# Altium PCB PCB2.PcbDoc
Units mil, origin at the board's own origin, x right, y up, seen from the top; angles counter-clockwise.
Board outline 2755.91 x 2755.91 mil, 4 copper layers (Top Layer, GND02, VCC03, Bottom Layer), stack 22.378 mil thick; 78 components, 66 nets, 270 pads, 287 vias.
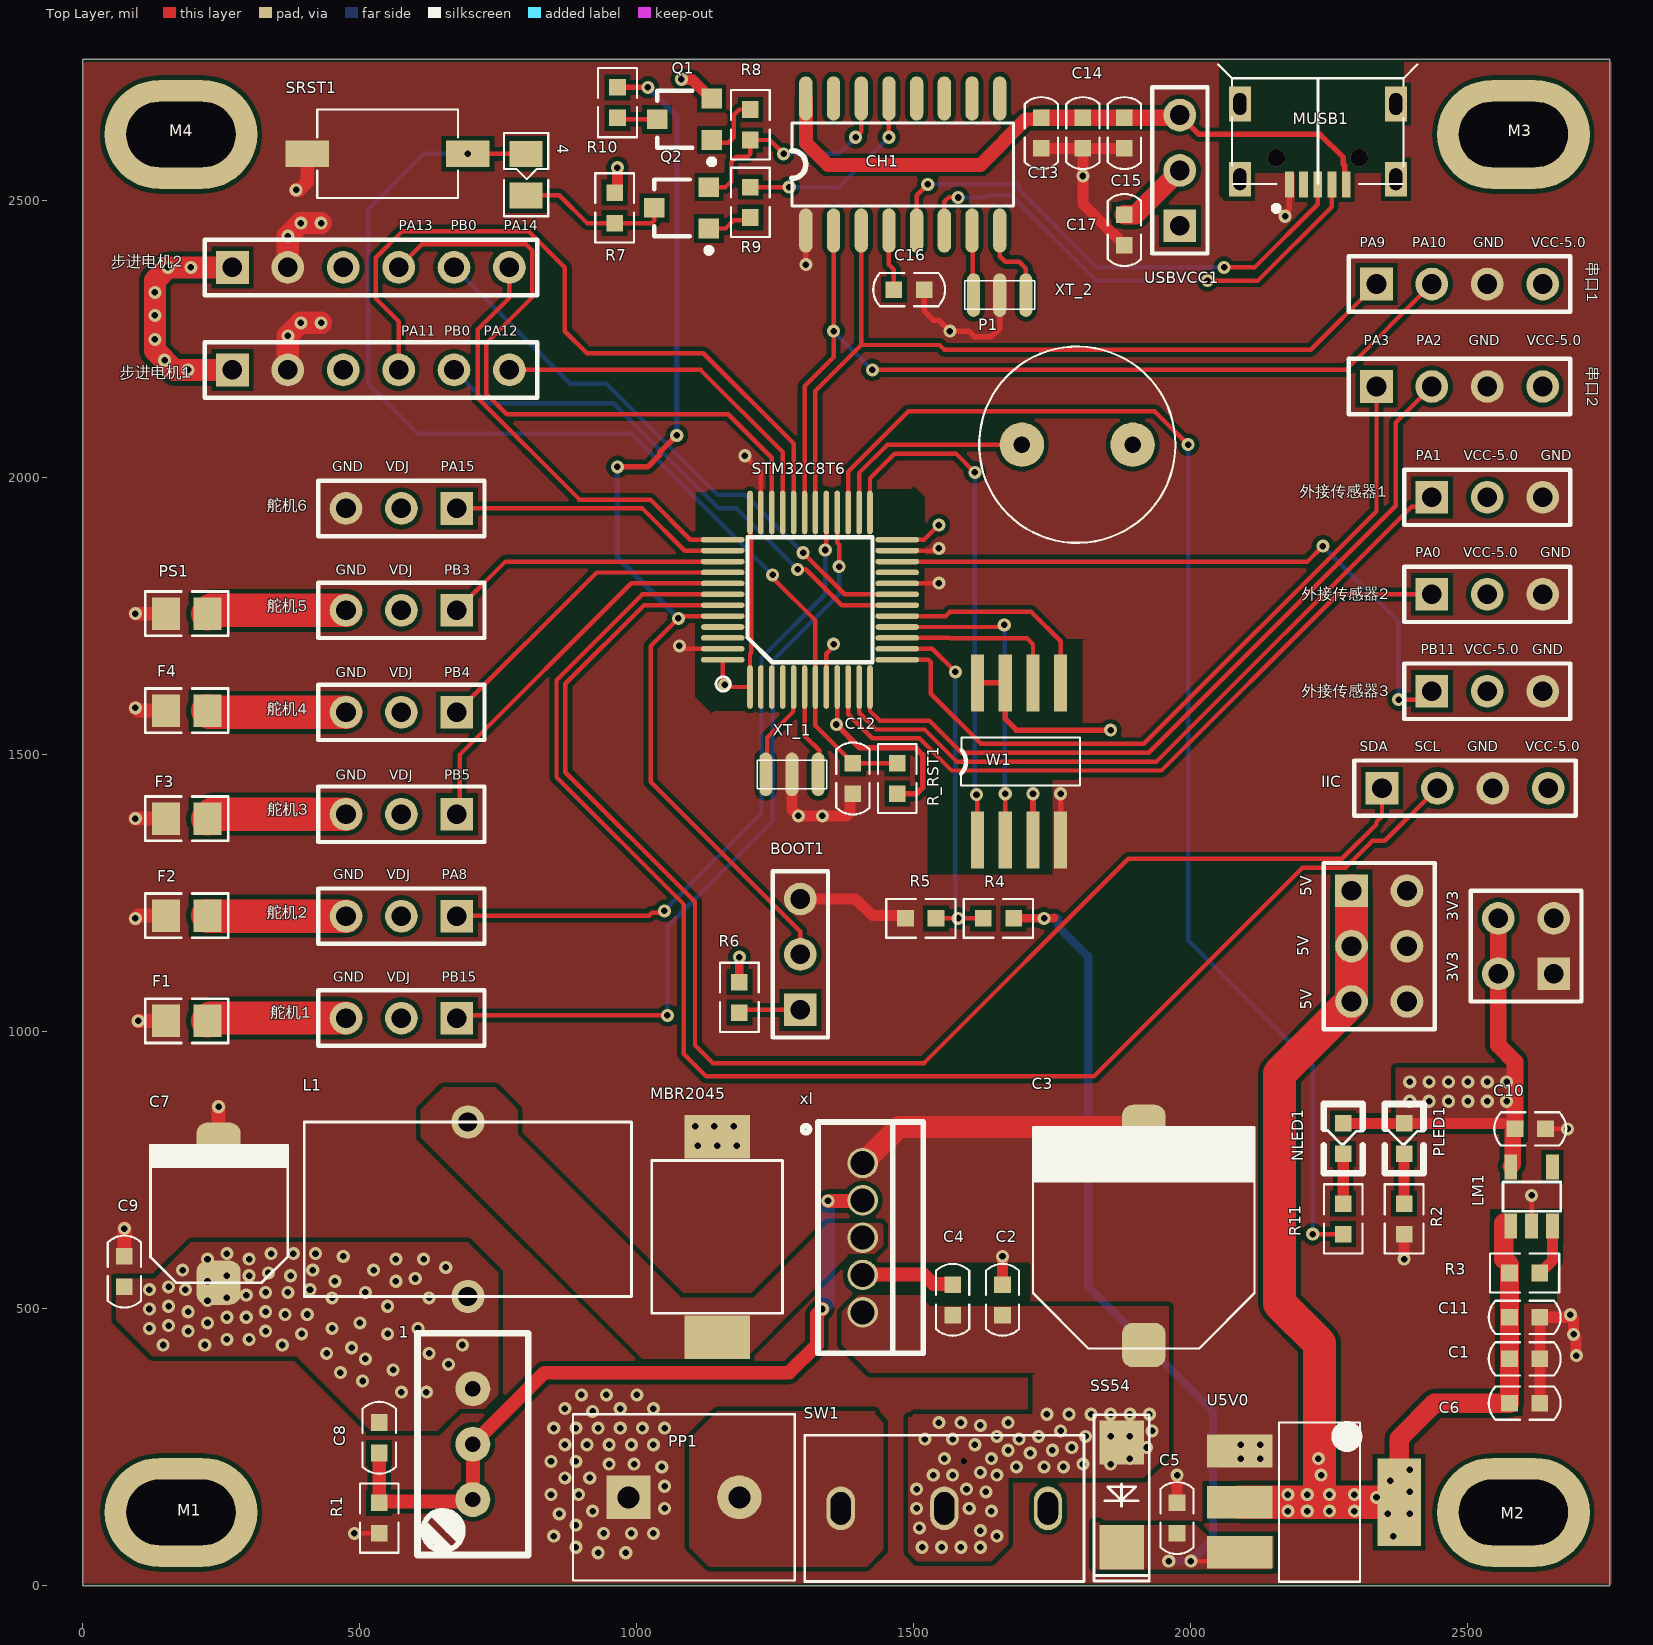
[diagram p0: Top Layer view]
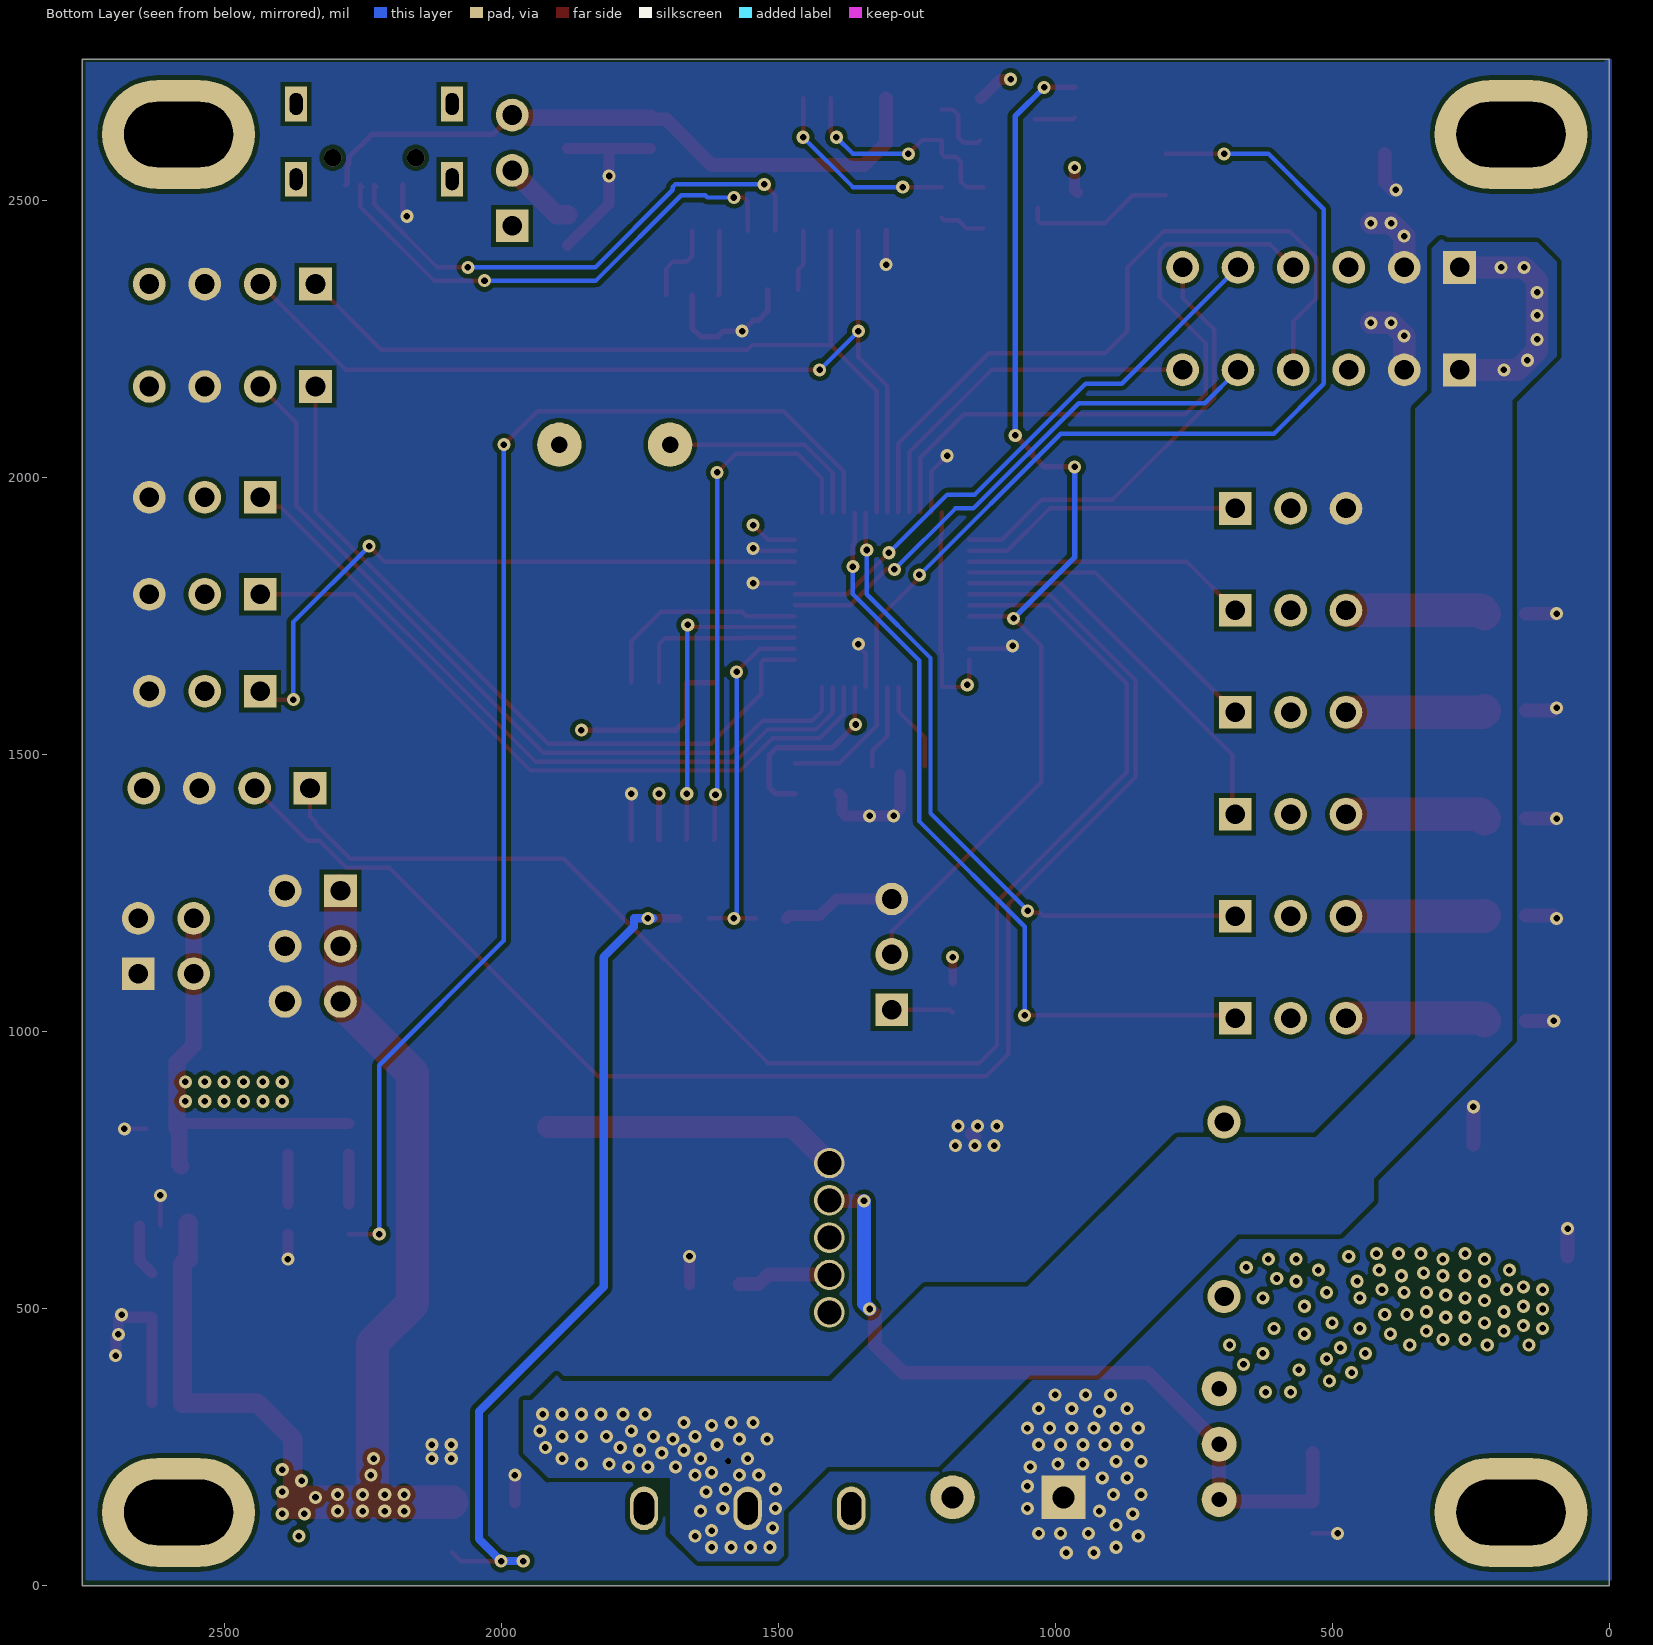
[diagram p1: Bottom Layer view, seen from below]
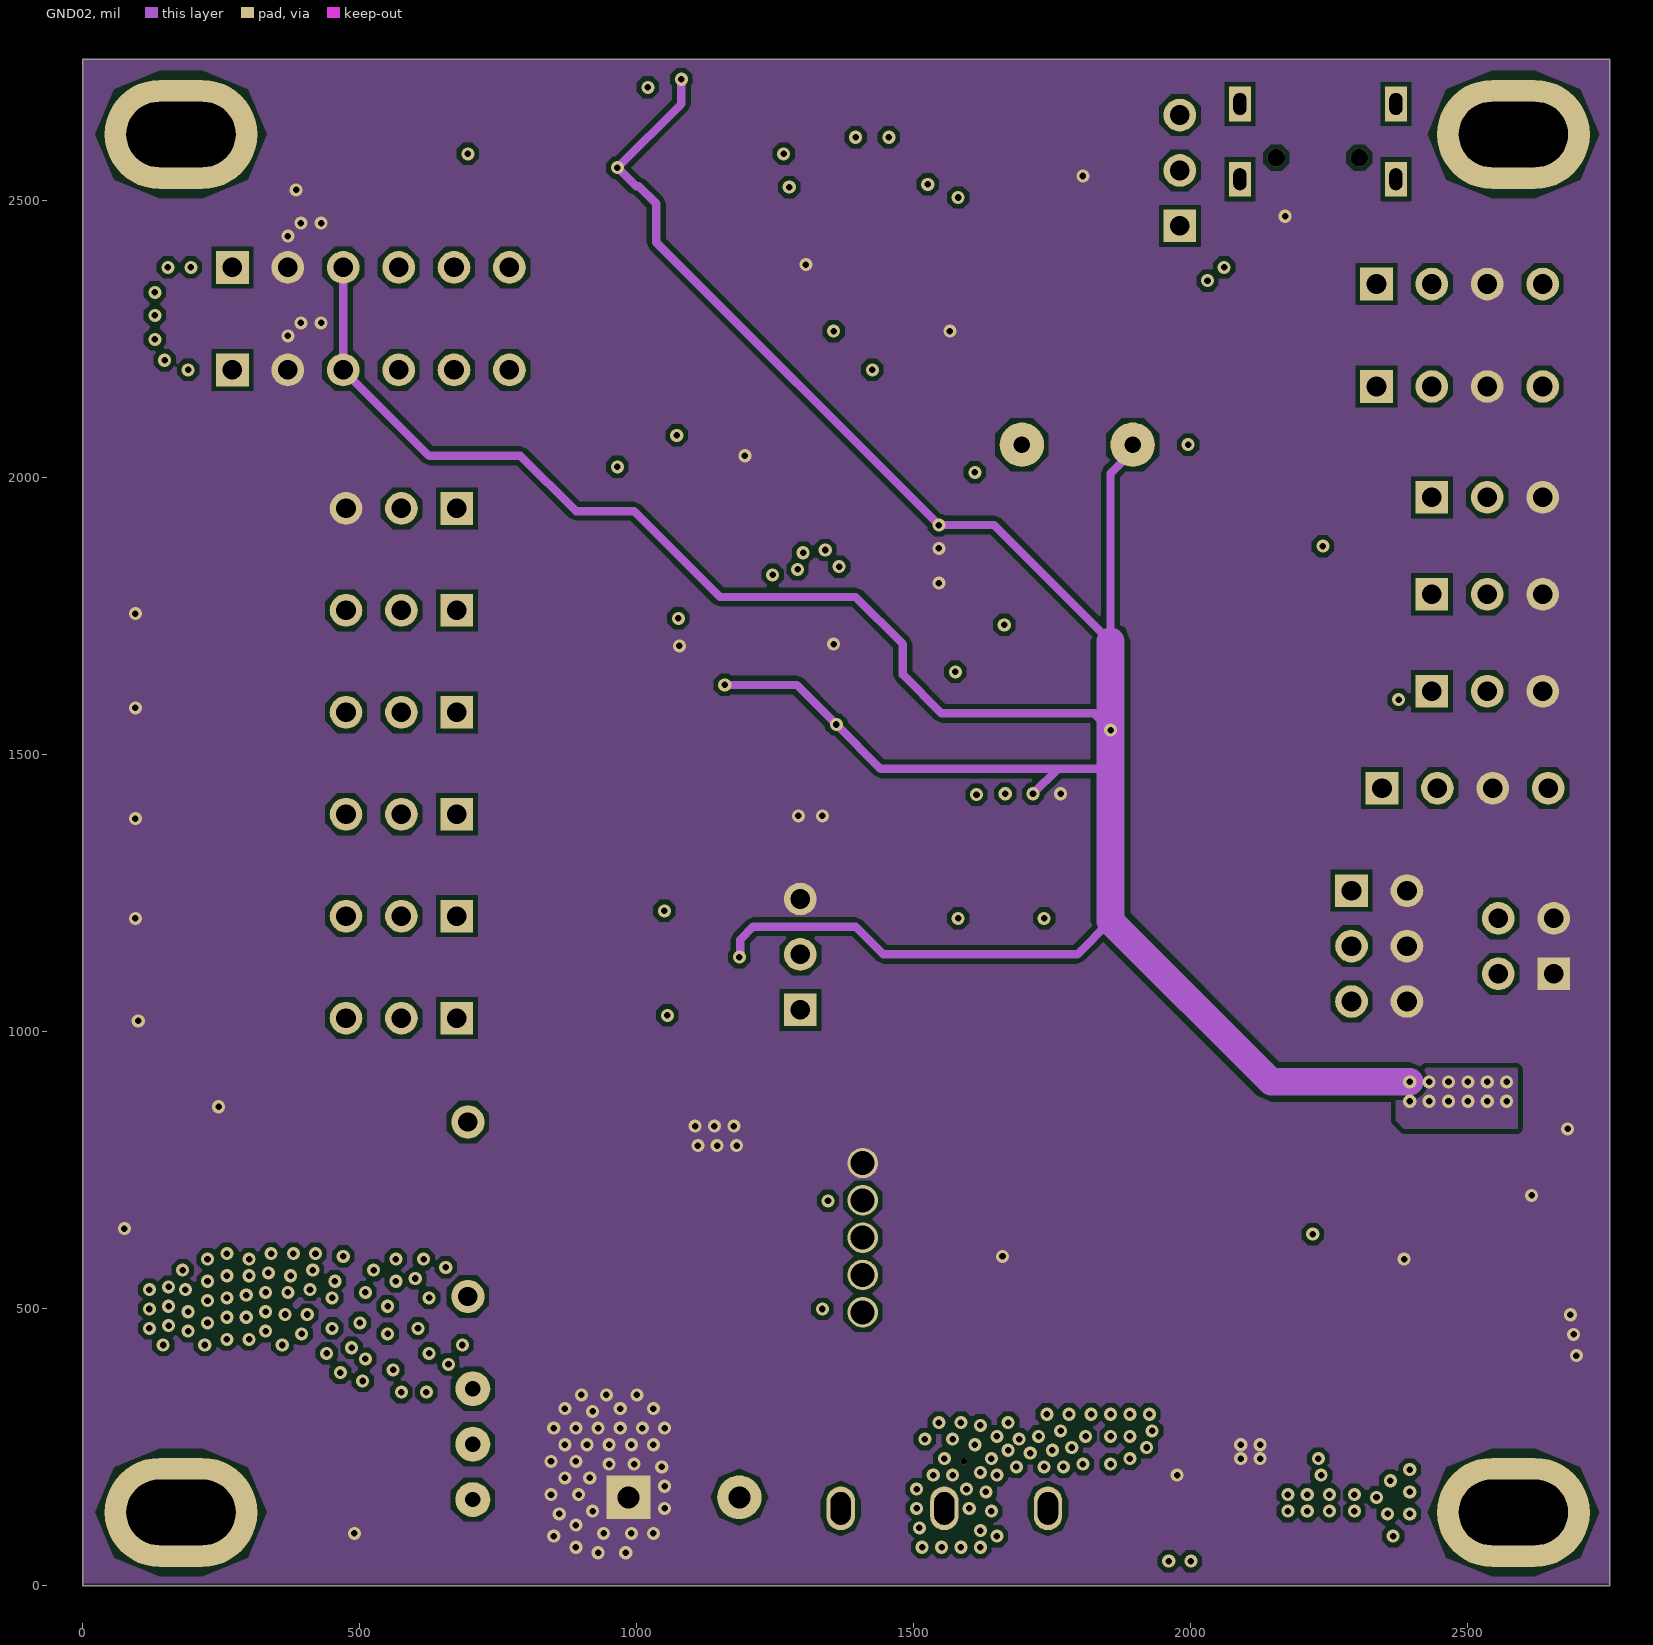
[diagram p2: GND02]
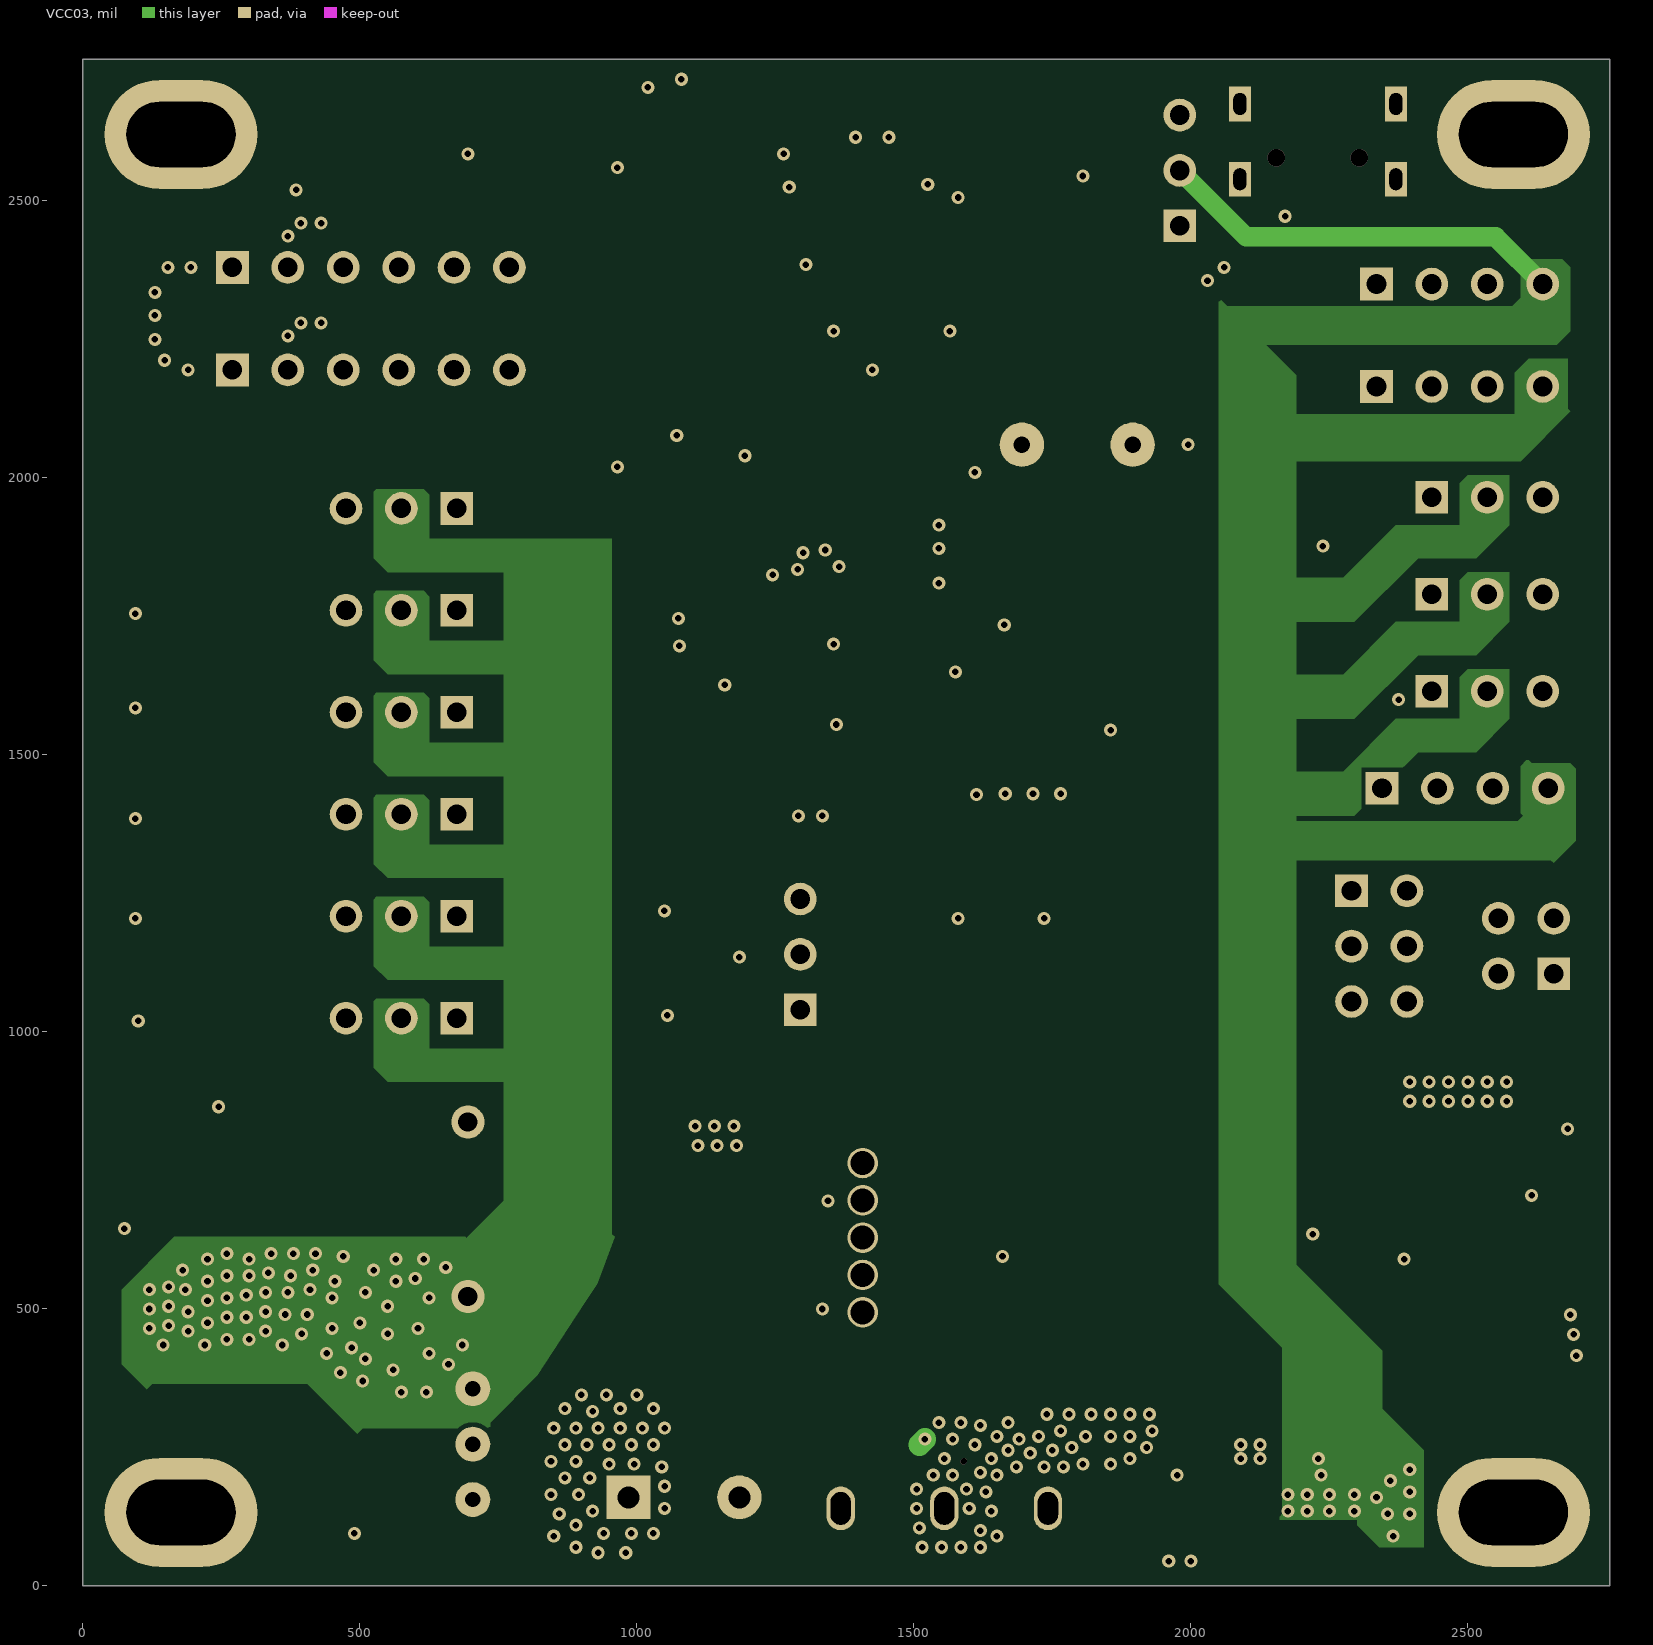
[diagram p3: VCC03]

## Layer stack, top to bottom
Top Solder: solder mask 0.4, Solder Resist, Dk 3.5
Top Layer: signal copper 1.4
Dielectric 2: prepreg 2.8, PP-006, Dk 4.1
GND02: signal copper 0.689
Dielectric 1: dielectric 12.6, FR-4, Dk 4.8
VCC03: signal copper 0.689
Dielectric 3: prepreg 2.8, PP-006, Dk 4.1
Bottom Layer: signal copper 1.4
Bottom Solder: solder mask 0.4, Solder Resist, Dk 3.5

## Board outline
0,0 2755.91,0 2755.91,2755.91 0,2755.91

## Design rules (kind name [scope] priority, off if disabled: settings)
Clearance [All] p1: gap=8 ignorepadtopadclearanceinfootprint=TRUE
Clearance ploy [InPolygon] p2: gap=15 ignorepadtopadclearanceinfootprint=TRUE
HoleSize [All] p1: absolutevalues=TRUE maxlimit=300 minlimit=1 maxpercent=80.000 minpercent=20.000
MinimumSolderMaskSliver MinimumSolderMaskSliver_1 [All] p1: minsoldermaskwidth=10
PolygonConnect [All] p1: connectstyle=Direct reliefconductorwidth=10 reliefentries=4 polygonreliefangle="90 Angle" airgapwidth=10
RoutingVias [All] p1: holewidth=11.81 width=23.62 viastyle="Through Hole" minholewidth=11.81 minwidth=23.62 maxholewidth=11.81 maxwidth=23.62
SilkToSilkClearance [All] p1: silktosilkclearance=0
SilkToSolderMaskClearance [IsPad] p1: minsilkscreentomaskgap=0 clearancetoexposedcopper=TRUE
SolderMaskExpansion [All] p1: expansion=4 istentingtop=FALSE
Width [All] p1: maxlimit=100 minlimit=8 preferedwidth=8 minimp=50.000000 maximp=50.000000 favimp=50.000000
26 further rules are at their usual default settings.

## Classes and differential pairs
component class Sheet1: q

## Components (designator, comment, footprint, x,y, rotation, side; value= is the part's Value field where it differs from the comment)
1 "Header3" pot（长方形） 715,355 r270 top
2 "Header 2X2" HDR2X2 2655,1105 r90 top
4 "Diode 1N4007" 0805L 800,2582.4 r270 top
5V "Header 3X2" HDR2X3 2290,1255 r270 top (schematic designator 3)
BOOT1 "Header 3" HDR1X3 1295,1040 r90 top
C1 "Cap" 0603C 2604,410 r180 top value=104
C2 "Cap" 0603C 1660,515 r90 top value=105
C3 "Cap Pol1" CAP_10_TIE 1915,828.7 r270 top value=470uf50V
C4 "Cap" 0603C 1570,515 r90 top value=105
C5 "Cap" 0603C 1975,124 r270 top value=104
C6 "Cap" 0603C 2604,330 r180 top value=104
C7 "1000uf25v" cap_6.3_tie 370,795.52 r270 top
C8 "Cap" 0603C 535,269 r270 top value=33nf
C9 "Cap" 0603C 75,566 r90 top value=105
C10 "Cap" 0603C 2614,825 r180 top value=104
C11 "Cap" 0603C 2604,485 r180 top value=104
C12 "Cap" 0603C 1390,1456 r90 top value=104
C13 "Cap" 0603C 1730,2624 r270 top value=104
C14 "Cap" 0603C 1805,2624 r270 top value=104
C15 "Cap" 0603C 1880,2624 r270 top value=104
C16 "Cap" 0603C 1490,2340 r0 top value=104
C17 "Cap" 0603C 1880,2446 r90 top value=104
CH1 "CH341" SOP16 1305,2447.5 r90 top
F1 "Res2" 0805R 152.6,1020 r0 top value=1K
F2 "Res2" 0805R 152.6,1210 r0 top value=1K
F3 "Res2" 0805R 152.6,1385 r0 top value=1K
F4 "Res2" 0805R 152.6,1580 r0 top value=1K
IIC "Header 4" HDR1X4 2345,1440 r0 top (schematic designator I1)
L1 "Inductor Iron Dot" L_8x15 695,680 r90 top value=47uH
LM1 "SPX5205M5-L-3.3" spx520 2652.5,751.3 r180 top
M1 "MountHole" M3-MountSlot 160,110 r0 top
M2 "MountHole" M3-MountSlot 2565,110 r0 top
M3 "MountHole" M3-MountSlot 2565,2597.2 r0 top
M4 "MountHole" M3-MountSlot 160,2597.2 r0 top
MBR2045 "Diode 1N4007" SS54 1145,630 r0 top
MUSB1 "USB" "microMINIusb 2" 2229.24,2531.33 r270 top
NLED1 "LED" 0603L 2275,835 r270 top
P1 "Speaker" beep_9mm 1795,2060 r180 top
PLED1 "LED" 0603L 2385,835 r270 top
PP1 "Header 2" 接线柱_2 985,160 r0 top
PS1 "Res2" 0805R 152.6,1755 r0 top value=1K
Q1 "PNP" sot-23 1085.79,2647.4 r90 top
Q2 "NPN" sot-23 1080.79,2487.6 r90 top
R1 "Res2" 0603R 535,150 r270 top value=2k
R2 "Res2" 0603R 2385,635 r90 top value=1K
R3 "Res2" 0603R 2575,565 r0 top value=1K
R4 "Res2" 0603R 1680,1205 r180 top value=20K
R5 "Res2" 0603R 1540,1205 r180 top value=10K
R6 "Res2" 0603R 1185,1090 r270 top value=10K
R7 "Res2" 0603R 960,2515 r270 top value=10K
R8 "Res2" 0603R 1205,2610 r90 top value=1K
R9 "Res2" 0603R 1205,2470 r90 top value=1K
R10 "Res2" 0603R 965,2705 r270 top value=1K
R11 "Res2" 0603R 2275,635 r90 top value=1K
R_RST1 "Res2" 0603R 1470,1430 r90 top value=1K
SRST1 "SW-PB" miniBUTTON 695,2585 r180 top
SS54 "Diode" 贴片_4007 1875,258.98 r270 top
STM32C8T6 "STM32" LQFP48 1203.95,1623.08 r90 top
SW1 "SW-6A" SW-6A 1303.03,271.89 r0 top
U5V0 "AMS1117" sot-223 2305,295 r270 top
USBVCC1 "Header 3" HDR1X3 1980,2455 r90 top
W1 "W25Q64" "sop8 - kuan" 1615,1387.27 r90 top
xl "XL4016E1" PCBComponent_1 1410,620 r270 top
XT_1 "xtal2" XTAL_3213 1280,1465 r0 top
XT_2 "xtal2" XTAL_3213 1655,2330 r180 top
串口1 "Header 4" HDR1X4 2335,2350 r0 top (schematic designator SER1)
串口2 "Header 4" HDR1X4 2335,2165 r0 top (schematic designator SER2)
外接传感器1 "Header 3" HDR1X3 2435,1965 r0 top (schematic designator CG1)
外接传感器2 "Header 3" HDR1X3 2435,1790 r0 top (schematic designator CG2)
外接传感器3 "Header 3" HDR1X3 2435,1615 r0 top (schematic designator CG3)
步进电机1 "Header 6" HDR1X6 270,2195 r0 top (schematic designator P2)
步进电机2 "Header 6" HDR1X6 270,2380 r0 top (schematic designator P3)
舵机1 "Header 3" HDR1X3 675,1025 r180 top (schematic designator DJ1)
舵机2 "Header 3" HDR1X3 675,1209 r180 top (schematic designator DJ2)
舵机3 "Header 3" HDR1X3 675,1393 r180 top (schematic designator DJ3)
舵机4 "Header 3" HDR1X3 675,1577 r180 top (schematic designator DJ4)
舵机5 "Header 3" HDR1X3 675,1761 r180 top (schematic designator DJ5)
舵机6 "Header 3" HDR1X3 675,1945 r180 top (schematic designator DJ6)

## Footprints (in the part's own frame and the unit in brackets; to place one, negate y for a bottom-side part, rotate by r counter-clockwise, add the part's x,y. Pads: shape width x height; smd on the part's side, far side on the other; paste and mask are expansions set on the pad)
0603C [mil]
  rect 30x30 smd: 1(-26,0) 2(29,0)
  silkscreen extent -63,-30 66,30
0603L [mil]
  rect 30x30 smd: 1(0,0) 2(55,0)
  silkscreen extent -35,-36 90,35
0603R [mil]
  rect 30x30 smd: 1(0,0) 2(55,0)
  silkscreen extent -35,-35 90,35
0805L [mm]
  rect 1.2x1.5 smd: 1(-0.061,0) 2(1.839,0)
  silkscreen extent -1.02,-1.02 2.79,1.02
0805R [mm]
  rect 1.3x1.5 smd: 1(-0.061,0) 2(1.839,0)
  silkscreen extent -1.02,-1.02 2.79,1.02
beep_9mm [mil]
  round 80 hole 30: 1(100,0) 2(-100,0)
  silkscreen extent -177,-177 177,177
cap_6.3_tie [mil]
  rrect50% 80x80 smd: 1(248,-125) 2(-1,-125)
  silkscreen extent 0,-248 248,0
CAP_10_TIE [mm]
  rrect50% 2.032x2 smd: 1(10,0) 2(0,0)
  silkscreen extent 0,-5.08 10.16,5.08
HDR1X3 [mm] "Connector; Header; 3 Position"
  rect 1.5x1.5 hole 0.9: 1(0,0)
  round 1.5 hole 0.9: 2(2.54,0) 3(5.08,0)
  silkscreen extent -1.27,-1.27 6.35,1.27
HDR1X4 [mm] "Connector; Header; 4 Position"
  rect 1.5x1.5 hole 0.9: 1(0,0)
  round 1.5 hole 0.9: 2(2.54,0) 3(5.08,0) 4(7.62,0)
  silkscreen extent -1.27,-1.27 8.89,1.27
HDR1X6 [mm] "Connector; Header; 6 Position"
  rect 1.5x1.5 hole 0.9: 1(0,0)
  round 1.5 hole 0.9: 2(2.54,0) 3(5.08,0) 4(7.62,0) 5(10.16,0) 6(12.7,0)
  silkscreen extent -1.27,-1.27 13.97,1.27
HDR2X2 [mm] "Connector; Header; 2x2 Position"
  rect 1.5x1.5 hole 0.9: 1(0,0)
  round 1.5 hole 0.9: 2(0,2.54) 3(2.54,0) 4(2.54,2.54)
  silkscreen extent -1.27,-1.27 3.81,3.81
HDR2X3 [mm] "Connector; Header; 3x2 Position"
  rect 1.5x1.5 hole 0.9: 1(0,0)
  round 1.5 hole 0.9: 2(0,2.54) 3(2.54,0) 4(2.54,2.54) 5(5.08,0) 6(5.08,2.54)
  silkscreen extent -1.27,-1.27 6.35,3.81
L_8x15 [mil]
  round 60 hole 35: 1(-157.48,0) 2(157.48,0)
  silkscreen extent -157,-295 157,295
LQFP48 [mil]
  oval 78.74x10 smd: 1(-0.4,-0.31) 2(-0.4,-19.99) 3(-0.4,-39.68) 4(-0.4,-59.36) 5(-0.4,-79.05) 6(-0.4,-98.73) 7(-0.4,-118.42) 8(-0.4,-138.1) 9(-0.4,-157.79) 10(-0.4,-177.47) 11(-0.4,-197.16) 12(-0.4,-216.84) 25(314.56,-216.84) 26(314.56,-197.16) 27(314.56,-177.47) 28(314.56,-157.79) 29(314.56,-138.1) 30(314.56,-118.42) 31(314.56,-98.73) 32(314.56,-79.05) 33(314.56,-59.36) 34(314.56,-39.68) 35(314.56,-19.99) 36(314.56,-0.31)
  oval 10x78.74 smd: 13(48.81,-266.05) 14(68.5,-266.05) 15(88.18,-266.05) 16(107.87,-266.05) 17(127.55,-266.05) 18(147.24,-266.05) 19(166.92,-266.05) 20(186.61,-266.05) 21(206.29,-266.05) 22(225.98,-266.05) 23(245.66,-266.05) 24(265.35,-266.05) 37(265.35,48.91) 38(245.66,48.91) 39(225.98,48.91) 40(206.29,48.91) 41(186.61,48.91) 42(166.92,48.91) 43(147.24,48.91) 44(127.55,48.91) 45(107.87,48.91) 46(88.18,48.91) 47(68.5,48.91) 48(48.81,48.91)
  silkscreen extent -8,-221 270,61
M3-MountSlot [mm]
  oval 7x5 hole 3 slot 5 at 0 deg: 1(0.436,0.579)
"microMINIusb 2" [mm]
  rect 1.6x1 hole 0.6 slot 1 at 0 deg: 0(-3.649,3.575) 0(-3.649,-3.575) 0(-0.199,3.575) 0(-0.199,-3.575)
  rect 1.2x0.4 smd: 1(0.046,1.295) 2(0.046,0.645) 3(0.046,-0.005) 4(0.046,-0.655) 5(0.046,-1.305)
  silkscreen extent -5.46,-4.57 1.26,4.56
miniBUTTON [mm]
  rect 2x1.2 smd: 1(0,0) 2(7.366,0)
  silkscreen extent 0.46,-2.03 6.91,2.03
PCBComponent_1 [mm]
  round 1.4 hole 1.1 paste+0 mask+0.051: 1(-3.642,-0.059) 2(-1.931,-0.059) 3(-0.222,-0.059) 4(1.488,-0.059) 5(3.199,-0.059)
  silkscreen extent -5.52,-2.82 5.08,2.72
pot（长方形） [mm]
  round 1.6 hole 0.7: 1(5.055,-0.279) 2(2.515,-0.279) 3(-0.025,-0.279)
  silkscreen extent -2.57,-2.82 7.59,2.26
"sop8 - kuan" [mm]
  rect 2.6x0.6 smd: 1(-1.035,0) 2(-1.035,-1.27) 3(-1.035,-2.54) 4(-1.035,-3.81) 5(6.165,-3.81) 6(6.165,-2.54) 7(6.165,-1.27) 8(6.165,0)
  silkscreen extent 1.47,-4.7 3.67,0.76
SOP16 [mil]
  oval 80x24 smd: 1(-1,0) 2(-1,-50) 3(-1,-100) 4(-1,-150) 5(-1,-200) 6(-1,-250) 7(-1,-300) 8(-1,-350) 9(237.5,-350) 10(237.5,-300) 11(237.5,-250) 12(237.5,-200) 13(237.5,-150) 14(237.5,-100) 15(237.5,-50) 16(237.5,0)
  silkscreen extent 43,-375 193,25
sot-23 [mm] "SOT-23; 3 Leads; Body 3.0 x 2.6 mm, inc. leads (LxW max)"
  rect 0.9x0.95 smd: 1(-0.95,-1.25) 2(0.95,-1.25) 3(0,1.25)
  silkscreen extent -2.07,-1.38 1.3,1.25
sot-223 [mm]
  rect 1.5x3 smd: 1(1.3,-5.5) 2(3.65,-5.5) 3(5.95,-5.5)
  rect 4x2 smd: 2(3.65,1.8)
  silkscreen extent 0,-3.7 7.3,0
spx520 [mil]
  rect 23x45 smd: 1(75,101.3) 2(37.5,101.3) 3(0,101.3) 4(0,-5) 5(75,-5)
  silkscreen extent -15,22 89,75
SS54 [mm]
  rect 3x2 smd: 1(0,4.6) 2(0,-4.6)
  silkscreen extent -3,-3.5 3,3.5
SW-6A [mm]
  oval 1.3x2 hole 0.927 slot 1.5 at 90 deg: 1(1.65,-3.35) 2(6.4,-3.35) 3(11.15,-3.35)
  silkscreen extent 0,-6.7 12.8,0
XTAL_3213 [mm]
  oval 0.6x2 smd: 1(-1.2,0) 2(0,0) 3(1.2,0)
  silkscreen extent -1.6,-0.65 1.6,0.65
接线柱_2 [mil]
  rect 80x78.74 hole 40: 1(0,0)
  oval 80x78.74 hole 40: 2(200,0)
  silkscreen extent -100,-150 300,150
贴片_4007 [mil]
  rect 80x80 smd: 1(0,0) 2(188.98,0)
  silkscreen extent -50,-50 250,50

## Part data
2: "Header, 2-Pin, Dual row", LatestRevisionDate=17-Jul-2002, LatestRevisionNote="Re-released for DXP Platform.", Publisher="Altium Limited"
4 MBR2045: "1 Amp General Purpose Rectifier", PackageDocument=Aug-1999, Code_JEDEC=DO-204-AL, ComponentLink1Description="Manufacturer Link", ComponentLink1URL=http://www.fairchildsemi.com/, ComponentLink2Description=Datasheet, ComponentLink2URL=http://www.fairchildsemi.com/ds/1N%2F1N4001.pdf, DatasheetDocument=1998, LatestRevisionDate=17-Jul-2002, LatestRevisionNote="Re-released for DXP Platform.", PackageReference=DO-41, Published=8-Jun-2000, Publisher="Altium Limited"
5V: "Header, 3-Pin, Dual row", LatestRevisionDate=17-Jul-2002, LatestRevisionNote="Re-released for DXP Platform.", Publisher="Altium Limited"
BOOT1 USBVCC1 外接传感器1 外接传感器2 外接传感器3 舵机1 舵机2 舵机3 舵机4 舵机5 舵机6: "Header, 3-Pin", LatestRevisionDate=17-Jul-2002, LatestRevisionNote="Re-released for DXP Platform.", Publisher="Altium Limited"
C1 C2 C4 C5 C6 C8 C9 C10 C11 C12 C13 C14 C15 C16 C17: "Capacitor", LatestRevisionDate=17-Jul-2002, LatestRevisionNote="Re-released for DXP Platform.", PackageReference=RAD-0.3, Published=8-Jun-2000, Publisher="Altium Limited"
C3: "Polarized Capacitor (Radial)", LatestRevisionDate=17-Jul-2002, LatestRevisionNote="Re-released for DXP Platform.", PackageReference=RB7.6-15, Published=8-Jun-2000, Publisher="Altium Limited"
C7: library part Cap_Pol
F1 F2 F3 F4 PS1 R1 R2 R3 R4 R5 R6 R7 R8 R9 R10 R11 R_RST1: "Resistor", LatestRevisionDate=17-Jul-2002, LatestRevisionNote="Re-released for DXP Platform.", PackageReference=AXIAL-0.4, Published=8-Jun-2000, Publisher="Altium Limited"
IIC 串口1 串口2: "Header, 4-Pin", LatestRevisionDate=17-Jul-2002, LatestRevisionNote="Re-released for DXP Platform.", Publisher="Altium Limited"
L1: "Magnetic-Core Inductor with Winding Polarity Marking", LatestRevisionDate=17-Jul-2002, LatestRevisionNote="Re-released for DXP Platform.", PackageReference=DIODE_SMC, Published=24-Mar-1999, Publisher="Altium Limited"
LM1: library part SPX5205M5-L-5-0
M1 M2 M3 M4: "固定孔"
P1: "Loudspeaker", LatestRevisionDate=17-Jul-2002, LatestRevisionNote="Re-released for DXP Platform.", PackageReference=PIN2, Published=24-Mar-1999, Publisher="Altium Limited"
PP1: "Header, 2-Pin", LatestRevisionDate=17-Jul-2002, LatestRevisionNote="Re-released for DXP Platform.", Publisher="Altium Limited"
SS54: "Default Diode", PackageDocument=Sep-1996, Code_JEDEC=DO-214-AB, LatestRevisionDate=17-Jul-2002, LatestRevisionNote="Re-released for DXP Platform.", PackageReference=SMC, Published=8-Jun-2000, Publisher="Altium Limited"
STM32C8T6: library part STM32F103C8T6
xl: Input Voltage=8V~40V, JLCPCB Part Class="Extended Part", LCSC Part Name="降压型 Vin=8V~40V Vout=1.25V~36V 8A", Manufacturer=XLSEMI(芯龙), Output Current (Max)=8A, Output Voltage=1.25V~36V, Switching Frequency=180kHz, Add into BOM=yes, Convert to PCB=yes, Datasheet=https://atta.szlcsc.com/upload/public/pdf/source/20221017/BA256A5392B705775B4C335FAFB3EDCF.pdf, Device=XL4016E1, Function=降压型, Manufacturer Part=XL4016E1, Name=XL4016E1, Number of Outputs=1, Supplier=LCSC, Supplier Footprint=TO-220-5, Supplier Part=C55881, Symbol=XL4016E1, Synchronous Rectification=否, Topology=降压式
步进电机1 步进电机2: "Header, 6-Pin", LatestRevisionDate=17-Jul-2002, LatestRevisionNote="Re-released for DXP Platform.", Publisher="Altium Limited"

## Via types
v1: diameter 23.62, hole 11.81, Top Layer to Bottom Layer, tented both sides, 284 vias
v2: diameter 31.5, hole 31.5, Top Layer to Bottom Layer, 2 vias
v3: diameter 11.81, hole 11.81, Top Layer to Bottom Layer, 1 vias

## Nets (pads, with @x,y where several pads share a name; then routed paths per layer and width w, separated by ;. In a path a pad name is that pad's centre, name@x,y a point inside that pad or via, vN(x,y) a via of type N, cw(c..) or ccw(c..) an arc to the next point about the centre after c; other vN are vias at no path point)
A_SCL: IIC.2 STM32C8T6.42 | length 2726.5
  Top Layer w8: STM32C8T6.42 1010,1790 855,1635 855,1460 1085,1230 1085,960 1125,920 1825,920 2201.53,1296.53 2279.15,1296.53 2327.63,1345 2350,1345 IIC.2
A_SDA: IIC.1 STM32C8T6.43 | length 2583.2
  Top Layer w8: STM32C8T6.43 1012.94,1770.32 871,1628.37 871,1469 1105,1235 1105,976 1137.19,943.81 1518.39,943.81 1887.1,1312.53 2272.53,1312.53 2335,1375 2335,1379.23 2345,1389.23 IIC.1
BOOT0: BOOT1.2 R10.1 STM32C8T6.44 | length 1977.7
  Top Layer w8: STM32C8T6.44 1079.13,1750.63 v1(1075,1746.5) 1025,1696.5 1025,1451.27 1294.74,1181.53 1294.74,1140.26 BOOT1.2
  Top Layer w10: v1(965,2020) 1019.65,2020 1041.02,2041.37 1041.02,2046.02 v1(1071.96,2076.96) ; R10.1 v1(1020,2705)
  Bottom Layer w10: v1(965,2020) 965,1856.5 v1(1075,1746.5) ; v1(1020,2705) 1071.96,2653.04 v1(1071.96,2076.96)
BOOT1: 2.1 2.3 5V.2 5V.4 5V.6 BOOT1.3 C1.1 C2.2 C3.2 C5.1 C6.1 C7.2 C9.2 C10.1 C11.1 C12.1 C13.2 C14.2 C15.2 C16.2 C17.1 CH1.1 F1.1 F2.1 F3.1 F4.1 IIC.3 LM1.2 MBR2045.1 MUSB1.5 PP1.1 PS1.1 R1.2 R2.1 R5.2 SRST1.2 STM32C8T6.8 STM32C8T6.20 STM32C8T6.23 STM32C8T6.35 STM32C8T6.47 U5V0.1 W1.4 xl.1 XT_1.2 XT_2.2 串口1.3 串口2.3 外接传感器1.3 外接传感器2.3 外接传感器3.3 步进电机1.2 步进电机2.2 舵机6.3 | length 3512
  Top Layer w8: v1(490,95) R1.2 ; v1(1076.84,1696.84) 1081.06,1696.84 1086.33,1691.57 STM32C8T6.47 ; v1(1195,2040) 1223.94,2011.06 STM32C8T6.35 ; STM32C8T6.8 1342.05,1682.82 1355,1695.77 v1(1355,1700) ; STM32C8T6.20 1470.16,1809.84 1544.84,1809.84 v1(1545,1810) ; STM32C8T6.23 1536.65,1868.74 1540.77,1872.87 v1(1545,1872.87) ; LM1.2 v1(2615,705) ; C10.1 v1(2680,825)
  Top Layer w10: v1(1305,2385) CH1.1 ; C16.2 1519,2301 1535.7,2284.3 1545.7,2284.3 v1(1565,2265) 1599.34,2265 1609.34,2255 1640,2255 1655,2270 XT_2.2 ; W1.4 v1(1765,1430) ; v1(2170,2472.31) 2170,2476 2177.87,2483.87 MUSB1.5
  Top Layer w20: XT_1.2 1280,1401.72 v1(1291.72,1390) 1378.28,1390 1385,1396.72 1385,1425 C12.1 ; BOOT1.3 1395,1240 1425,1210 1480,1210 R5.2 ; C2.2 v1(1660,595) ; C13.2 C14.2 ; C17.1 1860.86,2439.14 1860.4,2439.14 1805,2494.54 v1(1805,2545) C14.2 ; C15.2 C14.2 ; C5.1 v1(1975,200) ; v1(2385,590) R2.1 ; C6.1 C1.1 C11.1 2679.51,485 2684.02,489.51 v1(2685,489.51) 2685,488.53 2690.69,482.84 2690.69,453.33 2695.29,448.73 2695.29,416.67 v1(2695.98,415.98)
  Top Layer w25: C9.2 v1(75,645) ; v1(95,1205) 100,1210 F2.1 ; v1(95,1385) F3.1 ; v1(95,1585) 100,1580 F4.1 ; v1(95,1755) PS1.1 ; v1(100,1020) F1.1 ; C7.2 v1(245,865) ; v1(385,2520) 390.36,2520 405,2534.64 SRST1.2 ; MBR2045.1 MBR2045.1@1150,816.1
  Top Layer w40: 步进电机1.2 v1(370,2256.57) v1(393.43,2280) v1(430,2280) ; 步进电机2.2 v1(370,2436.57) v1(393.43,2460) v1(430,2460) ; xl.1 1472.99,828.7 C3.2
  other v1: 930,60 980,60 890,70 850,90 940,95 990,95 1030,95 890,110 860,130 920,135 1050,140 845,165 895,165 1050,180 870,195 915,195 1045,215 950,220 995,220 845,225 890,225 2090,230 2125,230 870,255 910,255 950,255 990,255 1030,255 2090,255 2125,255 850,285 890,285 930,285 970,285 1010,285 1050,285 920,315 870,320 970,320 1030,320 900,345 945,345 1000,345 2690.69,454.31 1110,795 1145,795 1180,795 1105,830 1140,830 1175,830 1335,1390
CAN_RX(PA11): STM32C8T6.32 步进电机1.4 | length 1344.1
  Top Layer w8: 步进电机1.4 570,2282.24 528.47,2323.77 528.47,2397.2 576.27,2445 805,2445 870,2380 870,2265 910,2225 1120,2225 1282.99,2062.01 STM32C8T6.32
CAN_TX(PA12): STM32C8T6.33 步进电机1.6 | length 663.8
  Top Layer w8: 步进电机1.6 1115,2195 1263.31,2046.69 STM32C8T6.33
DTR: CH1.13 R9.2 | length 357.3
  Top Layer w8: R9.2 v1(1275,2525) ; v1(1455,2615) CH1.13
  Bottom Layer w8: v1(1275,2525) 1365,2525 v1(1455,2615)
Net1_1: 1.1 1.2 C8.2 R1.1 xl.2 | length 1384.5
  Top Layer w25: C8.2 535,152.5 700.5,152.5 1.1 1.2 833,385 1275,385 1325,435 1325,490 v1(1335,500) ; v1(1345,695) 1406.63,695 xl.2
  Bottom Layer w25: v1(1335,500) 1345,510 v1(1345,695)
Net4_2: 4.2 Q2.3 R7.2 | length 277.1
  Top Layer w8: 4.2 860,2510 910,2460 R7.2 1026.89,2460 1031.57,2464.69 Q2.3
NetBOOT1_1: BOOT1.1 R6.2 | length 112.1
  Top Layer w8: R6.2 1190,1040 BOOT1.1
NetC4_2: C4.2 xl.4 | length 167.6
  Top Layer w25: xl.4@1410,562.33 1517.67,562.33 1535,545 1569,545 C4.2
NetC13_1: C13.1 C14.1 C15.1 CH1.16 MUSB1.1 USBVCC1.3 | length 1186.7
  Top Layer w10: USBVCC1.3 2015,2620 2233.14,2620 2275.11,2578.03 2275.11,2566.17 2277.36,2563.92 2277.36,2532.39 MUSB1.1
  Top Layer w25: CH1.16 1305,2604.64 1344.64,2565 1620,2565 1702.5,2647.5 1727.5,2647.5 C13.1
  Top Layer w30: C13.1 C14.1 C15.1 1975,2650 USBVCC1.3
NetC16_1: C16.1 CH1.4 | length 110.2
  Top Layer w8: CH1.4 1455,2385 1464,2376 C16.1
NetCH1_5: CH1.5 MUSB1.3 | length 945.4
  Top Layer w8: CH1.5 1505,2510 v1(1525,2530) ; v1(2060,2380) 2115,2380 2229.06,2494.06 MUSB1.3@2229.06,2525.65 ; MUSB1.3@2225.18,2525.65 MUSB1.3
  Bottom Layer w8: v1(1525,2530) 1685.31,2530 1690,2525.31 1690,2520 1830,2380 v1(2060,2380)
NetCH1_6: CH1.6 MUSB1.2 | length 929.2
  Top Layer w8: CH1.6 1555,2498.5 1563.51,2507.01 1579.18,2507.01 v1(1580,2506.19) ; v1(2030,2356.19) 2121.19,2356.19 2254.65,2489.65 MUSB1.2 ; MUSB1.2@2250.77,2525.65 MUSB1.2 ; MUSB1.2 2254.65,2525.65 MUSB1.2
  Bottom Layer w8: v1(1580,2506.19) 1627.71,2506.19 1631.52,2510 1675,2510 1828.81,2356.19 v1(2030,2356.19)
NetCH1_7: CH1.7 XT_2.3 | length 117.6
  Top Layer w8: CH1.7 1606.38,2445.12 1606.38,2331.38 XT_2.3
NetCH1_8: CH1.8 XT_2.1 | length 151.8
  Top Layer w8: CH1.8 1655,2414.17 1656.27,2412.9 1655,2411.63 1655,2400 1665,2390 1690,2390 1702.24,2377.76 XT_2.1
NetDJ1_3: F1.2 舵机1.3 | length 252.1
  Top Layer w60: F1.2 230,1025 舵机1.3
NetDJ2_3: F2.2 舵机2.3 | length 250.4
  Top Layer w60: F2.2 226,1209 舵机2.3
NetDJ3_3: F3.2 舵机3.3 | length 253.3
  Top Layer w60: F3.2 233,1393 舵机3.3
NetDJ4_3: F4.2 舵机4.3 | length 251.2
  Top Layer w60: F4.2 228,1577 舵机4.3
NetDJ5_3: PS1.2 舵机5.3 | length 252.5
  Top Layer w60: PS1.2 231,1761 舵机5.3
NetL1_2: L1.2 MBR2045.2 xl.3
NetLM1_3: LM1.3 R3.2 | length 94.3
  Top Layer w20: R3.2 2652.5,587.5 LM1.3
NetNLED1_2: NLED1.2 R11.2 | length 90
  Top Layer w20: R11.2 NLED1.2
NetPLED1_2: PLED1.2 R2.2 | length 90
  Top Layer w20: R2.2 PLED1.2
NetPP1_2: PP1.2 SW1.1
NetQ1_1: Q1.1 R8.2 | length 120.4
  Top Layer w8: Q1.1 1140,2605 1165,2605 1175,2615 1175,2655 1185,2665 R8.2
NetQ1_3: Q1.3 R10.2 | length 72.7
  Top Layer w8: R10.2 967.6,2647.4 Q1.3
NetQ2_1: Q2.1 R9.1 | length 83.2
  Top Layer w8: Q2.1 1160.2,2450.2 1175,2465 1200,2465 R9.1
PA0: STM32C8T6.10 外接传感器2.1 | length 1276.5
  Top Layer w8: STM32C8T6.10 1381.42,1573.58 1425,1530 1510,1530 1568,1472 1947,1472 2265,1790 外接传感器2.1
PA1: STM32C8T6.11 外接传感器1.1 | length 1314.3
  Top Layer w8: STM32C8T6.11 1401.49,1622.29 1401.49,1576.14 1431.63,1546 1519,1546 1577,1488 1938,1488 2398.16,1948.16 2418.16,1948.16 外接传感器1.1
PA2: STM32C8T6.12 串口2.2 | length 1450.3
  Top Layer w8: STM32C8T6.12 1420.79,1579.47 1438.21,1562.04 1527.96,1562.04 1586,1504 1924,1504 2370,1950 2370,2100 串口2.2
PA3: STM32C8T6.13 串口2.1 | length 1360.1
  Top Layer w8: STM32C8T6.13 1525.8,1671.89 1530.48,1667.2 1530.48,1610.52 1621,1520 1915,1520 2335,1940 串口2.1
PA4: R4.2 R5.1 STM32C8T6.14 | length 654.3
  Top Layer w8: STM32C8T6.14 1533.43,1691.57 v1(1575,1650) ; R5.1 v1(1580,1205) R4.2
  Bottom Layer w8: v1(1575,1650) 1575,1210 v1(1580,1205)
PA5: STM32C8T6.15 W1.6 | length 319.7
  Top Layer w8: STM32C8T6.15 1564.7,1711.26 1565.14,1710.82 1704.18,1710.82 1715,1700 W1.6
PA6: STM32C8T6.16 W1.2 | length 583.5
  Top Layer w8: STM32C8T6.16 1655.18,1730.95 1658.86,1734.63 v1(1663.09,1734.63) ; W1.2 v1(1665,1430)
  Bottom Layer w8: v1(1663.09,1734.63) 1664.05,1733.68 1664.05,1430.95 v1(1665,1430)
PA7: STM32C8T6.17 W1.5 | length 395.4
  Top Layer w8: STM32C8T6.17 1557.33,1750.63 1565.14,1758.44 1711.56,1758.44 1765,1705 W1.5
PA8: STM32C8T6.29 舵机2.1 | length 1219.6
  Top Layer w8: 舵机2.1 676,1210 1022,1210 1027.5,1215.5 1046.82,1215.5 v1(1049.81,1218.48) ; v1@1341.24,1869.96 1342.05,1870.76 STM32C8T6.29
  GND02 w8: v1(1340.04,1869.96) v1@1341.24,1869.96
  Bottom Layer w8: v1(1049.81,1218.48) 1049.81,1219.81 1225.02,1395.02 1225.02,1675.02 1340.04,1790.04 v1(1340.04,1869.96)
PA9: CH1.3 STM32C8T6.30 串口1.1 | length 1526
  Top Layer w8: STM32C8T6.30 1322.36,2157.36 1405,2240 ; CH1.3 1405,2240 ; 串口1.1 2216.19,2231.19 1555.14,2231.19 1546.33,2240 1405,2240
PA13: STM32C8T6.34 步进电机2.4 | length 1218.1
  Top Layer w8: 步进电机2.4 611.53,2421.53 800.31,2421.53 811.53,2410.31 811.53,2326.53 728.47,2243.47 728.47,2151.53 765,2115 1165,2115 1243.62,2036.38 STM32C8T6.34
PA14: STM32C8T6.37 步进电机2.6 | length 807.7
  Top Layer w8: 步进电机2.6 770,2325 712.47,2267.47 712.47,2144.9 896.37,1961 1024,1961 1096.57,1888.43 STM32C8T6.37
PA15: STM32C8T6.38 舵机6.1 | length 511.6
  Top Layer w8: 舵机6.1 1010,1945 1086.26,1868.74 STM32C8T6.38
PB0: STM32C8T6.18 步进电机1.5 | length 975.9
  Top Layer w8: v1(1290,1835) 1305,1835 1369.68,1770.32 STM32C8T6.18
  Bottom Layer w8: 步进电机1.5 730,2135 957.63,2135 1147.63,1945 1180,1945 v1(1290,1835)
PB1: STM32C8T6.19 步进电机2.5 | length 1042.5
  Top Layer w8: v1(1300,1865) 1375,1790 STM32C8T6.19
  Bottom Layer w8: 步进电机2.5@667.81,2370.23 679.77,2370.23 879.88,2170.12 945.14,2170.12 1145.25,1970 1195,1970 v1(1300,1865)
PB3: STM32C8T6.39 舵机5.1 | length 516.5
  Top Layer w8: 舵机5.1 763.05,1849.05 STM32C8T6.39
PB4: STM32C8T6.40 舵机4.1 | length 584.6
  Top Layer w8: 舵机4.1 927.37,1829.37 STM32C8T6.40
PB5: STM32C8T6.41 舵机3.1 | length 712.4
  Top Layer w8: 舵机3.1 680,1398 680,1500 989.68,1809.68 STM32C8T6.41
PB8: STM32C8T6.45
PB9: STM32C8T6.46
PB10: STM32C8T6.21
PB11: STM32C8T6.22 外接传感器3.1 | length 1179.4
  Top Layer w8: STM32C8T6.22 2210.38,1849.05 v1(2238.16,1876.84) ; v1(2375,1600) 2420,1600 外接传感器3.1
  Bottom Layer w8: v1(2238.16,1876.84) 2375,1740 v1(2375,1600)
PB12: STM32C8T6.25 W1.1 | length 949.1
  Top Layer w8: STM32C8T6.25 1420.79,1999.53 1465.26,2044 1576,2044 v1(1610,2010) ; v1(1613.03,1428.41) 1614.01,1427.43 1614.01,1347.52 W1.1
  Bottom Layer w8: v1(1610,2010) 1610,1431.44 v1(1613.03,1428.41)
PB13: P1.1 STM32C8T6.26 | length 386.2
  Top Layer w8: STM32C8T6.26 1401.1,2008.73 1452.37,2060 P1.1
PB14: R11.1 STM32C8T6.27 | length 2330.5
  Top Layer w8: STM32C8T6.27 1381.42,2011.67 1489.75,2120 1935,2120 v1(1995,2060) ; v1(2220,635) R11.1
  Bottom Layer w8: v1(1995,2060) 1995,1165 2220,940 v1(2220,635)
PB15: STM32C8T6.28 舵机1.1 | length 1419.5
  Top Layer w8: 舵机1.1 680,1030 v1(1055,1030) ; STM32C8T6.28 1361.73,1883.14 1365.05,1879.82 1365.05,1840.05 v1(1365,1840)
  Bottom Layer w8: v1(1055,1030) 1055,1190 1245,1380 1245,1670 1365,1790 v1(1365,1840)
RST: 4.1 C12.2 R_RST1.2 SRST1.1 STM32C8T6.7 | length 1994.5
  Top Layer w8: v1(695,2585) 799.8,2585 4.1 ; v1(1245,1825) 1245,1820 1322.36,1742.64 STM32C8T6.7 1322.36,1552.64 C12.2 R_RST1.2
  Bottom Layer w8: v1(695,2585) 615,2585 515,2485 515,2170 605,2080 990,2080 v1(1245,1825)
RTS: CH1.14 Q2.2 R8.1 | length 432.5
  Top Layer w8: Q2.2 1160,2525 1170,2535 1170,2570 1175,2575 1175,2575.31 1179.69,2580 1200,2580 1205,2585 R8.1 1240,2610 v1(1265,2585) ; v1(1395,2615) 1405,2625 CH1.14
  Bottom Layer w8: v1(1265,2585) 1365,2585 v1(1395,2615)
RXD1: CH1.2 STM32C8T6.31 串口1.2 | length 1703.7
  Top Layer w8: STM32C8T6.31 1302.68,2165.67 1355,2217.99 v1(1355,2265) CH1.2 ; v1(1425,2195) 2280,2195 串口1.2
  Bottom Layer w8: v1(1355,2265) v1(1425,2195)
VCC-3.3: 2.2 2.4 C10.2 LM1.5 NLED1.1 P1.2 PLED1.1 Q1.2 R6.1 R7.1 R_RST1.1 STM32C8T6.1 STM32C8T6.9 STM32C8T6.24 STM32C8T6.36 STM32C8T6.48 W1.3 W1.7 W1.8 步进电机1.3 步进电机2.3 | length 8671.4
  Top Layer w8: STM32C8T6.48 1155.04,1629.96 v1(1158.68,1626.32) 1162.32,1622.68 STM32C8T6.1 1204.25,1682.38 1206.41,1684.53 1206.41,1895.47 1204.64,1897.24 1204.64,1937.26 STM32C8T6.36 ; v1(1360,1555) 1361.73,1556.73 STM32C8T6.9 ; STM32C8T6.24 1518.43,1888.43 v1(1545,1915) ; LM1.5 LM1.5@2577.5,757.5
  Top Layer w10: v1(1360,1555) 1402,1513 1502.96,1513 1515.86,1500.1 1515.86,1440.86 1505,1430 R_RST1.1 ; W1.8 W1.7 1665,1565 1685,1545 v1(1855,1545) ; W1.3 v1(1715,1430)
  Top Layer w15: R6.1 v1(1185,1135)
  Top Layer w20: R7.1 965,2520 v1(965,2560) ; v1(1080.35,2719.65) 1081.04,2718.96 1099.86,2718.96 1134.02,2684.8 Q1.2 ; NLED1.1 PLED1.1 2575,835 2581,829 C10.2@2581,821
  Top Layer w30: 2.4 2.2 2555,976.07 2585,946.07 C10.2 2581,821 2581,761 LM1.5@2577.5,757.5
  GND02 w15: 步进电机2.3 步进电机1.3 625,2040 790,2040 890,1940 995,1940 1150,1785 1395,1785 1480,1700 1480,1645 1550,1575 1825,1575 v1(1855,1545) ; v1(1080.35,2719.65) 1080.35,2675.35 v1(965,2560) 998.32,2526.68 1003.32,2526.68 1035,2495 1035,2425 v1(1545,1915) 1645,1915 1649.99,1910.01 1855,1705 1855,2008.31 1895,2048.31 P1.2 ; v1(1158.68,1626.32) 1288.68,1626.32 v1(1360,1555) 1440,1475 1760,1475 ; v1(1185,1135) 1186.65,1136.65 1186.65,1166.65 1210,1190 1395,1190 1445,1140 1795,1140 1855,1200 ; v1(1715,1430) 1760,1475 ; 1855,1475 1760,1475
  GND02 w50: 1855,1705 v1(1855,1545) 1855,1475 1855,1200 2145,910 v1(2395,910)
  other v1: 2395,875 2430,875 2465,875 2500,875 2535,875 2570,875 2430,910 2465,910 2500,910 2535,910 2570,910
VCC-5.0: 5V.1 5V.3 5V.5 C1.2 C6.2 C11.2 C17.2 IIC.4 LM1.1 R3.1 U5V0.2 USBVCC1.2 串口1.4 串口2.4 外接传感器1.2 外接传感器2.2 外接传感器3.2 | length 3029.6
  Top Layer w35: C17.2 1900,2475 USBVCC1.2 ; U5V0.2@2375.87,151.3 2375.87,265.87 2440,330 C6.2 C1.2 C11.2 R3.1 2575,580 2565,590 2565,655
  Top Layer w40: U5V0.2@2088.46,151.3 U5V0.2@2097.17,160
  Top Layer w60: U5V0.2@2088.46,151.3 2232.17,151.3 ; 5V.1 5V.3 5V.5 2160,925 2160,510 2232.17,437.83 2232.17,151.3 ; U5V0.2@2375.87,151.3 2232.17,151.3
  VCC03 w35: USBVCC1.2 2100,2435 2550,2435 串口1.4
  other v1: 2365,90 2355,130 2395,130 2175,135 2210,135 2250,135 2295,135 2335,160 2175,165 2210,165 2250,165 2295,165 2395,170 2360,190 2235,200 2395,210 2230,230
VCC-IN: C2.1 C3.1 C4.1 SS54.1 SW1.2 xl.5 步进电机1.1 步进电机2.1 | length 453.9
  Top Layer w40: 步进电机1.1 v1(190,2195) 165,2195 130,2230 130,2356.57 v1(153.43,2380) 步进电机2.1
  VCC03 w40: 步进电机1.1 步进电机1.1@276.37,2188.63 ; 1510,255 v1(1520,265)
  other v1: 1515,70 1550,70 1585,70 1620,70 1650,90 1620,100 1510,105 1640,135 1505,140 1600,140 1630,170 1505,175 1595,175 1535,200 1570,200 1650,200 1620,205 1685,215 1735,215 1770,215 1805,220 1855,220 1555,230 1640,230 1890,230 1710,240 1670,245 1750,245 1785,250 1920,250 1610,255 1570,265 1690,265 1650,270 1725,270 1810,270 1855,270 1890,270 1765,280 1930,280 1620,290 1545,295 1585,295 1670,295 1740,310 1780,310 1820,310 1855,310 1890,310 1925,310 147.5,2212.5 130,2250 130,2293.28 130,2335 195,2380
  other v3: 1590,225
VDJ: 1.3 C7.1 C8.1 C9.1 L1.1 舵机1.2 舵机2.2 舵机3.2 舵机4.2 舵机5.2 舵机6.2
  other v1: 575,350 620,350 505,370 465,385 560,390 660,400 510,410 440,420 625,420 485,430 145,435 220,435 360,435 685,435 260,445 300,445 395,455 550,455 190,460 330,460 120,465 450,465 605,465 155,470 225,475 500,475 260,485 295,485 365,490 405,490 190,495 330,495 120,500 155,505 550,505 225,515 260,520 450,520 625,520 295,525 330,530 370,530 510,530 120,535 185,535 410,535 155,540 225,550 455,550 565,550 600,555 260,560 300,560 375,560 335,565 180,570 415,570 525,570 655,575 225,590 300,590 565,590 615,590 470,595 260,600 340,600 380,600 420,600
VIN: C5.2 R4.1 SS54.2 U5V0.3 | length 1536.7
  Top Layer w8: v1(2000,45) 2072.72,45 U5V0.3
  Top Layer w15: R4.1 1752,1205 1753.5,1206.5
  Bottom Layer w15: v1@1725,1205 v1(1735,1205) 1760,1205 1760,1190 1815,1135 1815,540 2040,315 2040,85 v1(2000,45) v1(1960,45)
XTAL1: STM32C8T6.5 XT_1.1 | length 162.3
  Top Layer w8: XT_1.1@1235.51,1480 1235.51,1531.37 1282.61,1578.47 1282.61,1622.29 STM32C8T6.5
XTAL2: STM32C8T6.6 XT_1.3 | length 154
  Top Layer w8: STM32C8T6.6 1302.68,1534.88 1330,1507.56 XT_1.3@1330,1480
pads on no net: CH1.9 CH1.10 CH1.11 CH1.12 CH1.15 LM1.4 M1.1 M2.1 M3.1 M4.1 MUSB1.0 MUSB1.4 STM32C8T6.2 STM32C8T6.3 STM32C8T6.4 SW1.3 USBVCC1.1
copper on no net:
  other v2: 2154.25,2578.08 2303.86,2578.08

## Polygon pours and split planes (outlines as drawn)
BOOT1 on Top Layer "BOOT1_L01_P036" (solid, remove dead copper, pour order 36): -5,2755 0,2750 0,5 2750,5 2755,0 2760,5 2760,2750 5,2750 -5,2760
VCC-3.3 on Top Layer "VCC-3.3_L01_P032" (solid, pour order 32): 2370,830 2370,935 2590,935 2590,835 2375,835
NetL1_2 on Top Layer "NETL1_2_L01_P005" (solid, pour order 5): 1430,600 1445,615 1445,655 1345,655 1210,520 1080,520 785,815 785,860 745,900 650,900 610,860 610,810 1010,410 1195,410 1380,595 1380,600
VIN on Top Layer "VIN_L01_P007" (solid, pour order 7): 1835,110 2010,110 2030,90 2150,90 2150,35 2145,30 1830,30 1825,35 1825,115 1835,115
VDJ on Top Layer "VDJ_L01_P006" (solid, pour order 6): 520,280 640,280 680,320 725,320 750,345 750,565 695,620 195,620 130,555 60,555 60,480 125,415 385,415
VCC-IN on Top Layer "VCC-IN_L01_P002" (solid, pour order 2): 1490,305 1490,60 1505,45 1640,45 1670,75 1670,195 1915,195 1960,240 1960,505 1530,505 1510,525 1400,525 1370,495 1370,435 1420,385 1720,385 1715,380 1715,310 1500,310 1495,305
BOOT1 on Top Layer "BOOT1_L01_P001" (solid, pour order 1): 1065,85 1040,85 995,40 990,45 860,45 820,85 820,300 880,360 1035,360 1065,330
NetPP1_2 on Top Layer "NETPP1_2_L01_P000" (solid, pour order 0): 1095,70 1095,265 1145,315 1430,315 1430,310 1445,295 1445,65 1415,35 1130,35
VCC-5.0 on VCC03 "VCC-5.0_L03_P031" (solid, pour order 31): 2610,2215 2680,2215 2680,2125 2685,2120 2595,2030 2105,2030 2100,2035 2105,2040 2105,2100 2155,2100 2175,2120 2180,2115 2585,2115 2585,2190
VCC-5.0 on VCC03 "VCC-5.0_L03_P030" (solid, pour order 30): 2050,2325 2065,2310 2580,2310 2595,2325 2595,2395 2670,2395 2685,2380 2685,2265 2660,2240 2085,2240 2085,2283.47 2050,2318.47
VCC-5.0 on VCC03 "VCC-5.0_L03_P029" (solid, pour order 29): 2610,1490 2615,1485 2685,1485 2695,1475 2695,1345 2655,1305 2650,1310 2155,1310 2125,1340 2130,1345 2130,1380 2590,1380 2600,1390 2595,1395 2595,1480 2605,1490
VCC-5.0 on VCC03 "VCC-5.0_L03_P028" (solid, pour order 28): 2500,1655 2575,1655 2575,1565 2515,1505 2410,1505 2295,1390 2160,1390 2140,1410 2140,1470 2275,1470 2370,1565 2485,1565 2485,1640
VCC-5.0 on VCC03 "VCC-5.0_L03_P027" (solid, pour order 27): 2500,1830 2575,1830 2575,1740 2515,1680 2410,1680 2295,1565 2160,1565 2140,1585 2140,1645 2275,1645 2370,1740 2485,1740 2485,1815
VCC-5.0 on VCC03 "VCC-5.0_L03_P026" (solid, pour order 26): 2500,2005 2575,2005 2575,1915 2515,1855 2410,1855 2295,1740 2160,1740 2140,1760 2140,1820 2275,1820 2370,1915 2485,1915 2485,1990
VCC-5.0 on VCC03 "VCC-5.0_L03_P025" (solid, pour order 25): 2160,120 2300,120 2300,110 2340,70 2420,70 2420,245 2345,320 2345,425 2190,580 2190,2185 2050,2325 2050,545 2165,430 2165,130 2160,125
VDJ on VCC03 "VDJ_L03_P011" (solid, pour order 11): 692.5,627.5 690,630 165,630 70,535 70,400 115,355 125,365 405,365 495,275 505,285 735,285 735,295 820,380 905,510 928.52,545.97 960,630 955,635 955,1860 955,1890.66 760,1890.66 760,1910 760,695
VDJ on VCC03 "VDJ_L03_P018" (solid, pour order 18): 615,1060 625,1050 625,970 790,970 790,885 765,910 550,910 525,935 525,1055 530,1060
VDJ on VCC03 "VDJ_L03_P017" (solid, pour order 17): 615,1244 625,1234 625,1154 790,1154 790,1069 765,1094 550,1094 525,1119 525,1239 530,1244
VDJ on VCC03 "VDJ_L03_P016" (solid, pour order 16): 615,1428 625,1418 625,1338 790,1338 790,1253 765,1278 550,1278 525,1303 525,1423 530,1428
VDJ on VCC03 "VDJ_L03_P015" (solid, pour order 15): 615,1612 625,1602 625,1522 790,1522 790,1437 765,1462 550,1462 525,1487 525,1607 530,1612
VDJ on VCC03 "VDJ_L03_P014" (solid, pour order 14): 615,1796 625,1786 625,1706 790,1706 790,1621 765,1646 550,1646 525,1671 525,1791 530,1796
VDJ on VCC03 "VDJ_L03_P013" (solid, pour order 13): 615,1980 625,1970 625,1890 790,1890 790,1805 765,1830 550,1830 525,1855 525,1975 530,1980
BOOT1 on Bottom Layer "BOOT1_L04_P037" (solid, pour order 37): 5,2755 10,2750 2750,2750 2750,5 2745,10 -5,10 -5,2760
VCC-IN on Bottom Layer "VCC-IN_L04_P024" (solid, pour order 24): 300,2430 295,2425 130,2425 95,2390 95,2220 175,2140 175,985 425,735 425,695 485,635 670,635 925,380 1045,380 1210,215 1410,215 1490,135 1490,55 1500,45 1645,45 1695,95 1695,195 1915,195 1960,240 1960,335 1945,335 1900,380 1890,370 1405,370 1235,540 1050,540 780,810 530,810 350,990 350,2125 320,2155 320,2415 305,2430
BOOT1 on GND02 "BOOT1_L02_P035" (solid, pour order 35): 0,2755 0,5 2755,5 2755,2755
VCC-3.3 on GND02 "VCC-3.3_L02_P034" (solid, pour order 34): 2370,935 2370,840 2385,825 2590,825 2590,930 2595,935

## Other copper
Top Layer:
  pour cut-out: 1525.67,581.64 1525.67,459.33 1530,455 1710,455 1710,580 1705,585 1703.23,583.23 1517.67,583.23
  pour cut-out: 2050,2750 2050,2510.5 2060.82,2499.68 2111.14,2550 2293.8,2550 2296.11,2552.31 2298.42,2550 2365,2550 2385,2570 2385,2750
  pour cut-out: 2540,680 2540,510 2660,510 2660,680
  pour cut-out: 1529.11,1487.05 1822.95,1487.05 1825,1485 1795,1455 1750,1455 1750,1285 1525,1285 1525,1482.94
  pour cut-out: 1130,1980 1125,1975 1105,1975 1105,1605 1135,1575 1140,1580 1520,1580 1520,1965 1500,1985 1495,1980
  pour cut-out: 1535,1710 1540,1705 1540,1545 1805,1545 1805,1705 1810,1710
Bottom Layer:
  pour cut-out: 2065,2750 2060.82,2745.82 2060.82,2499.68 2397.69,2499.68 2410,2511.99 2410,2750

## Silkscreen, mask and mechanical layers (free items; w line width, h text height)
Top Overlay:
  text "PA13    PB0      PA14" at 570,2440.32 h30
  text "PA9      PA10      GND      VCC-5.0" at 2305,2410.41 h30
  text "PA11  PB0   PA12" at 575,2250.32 h30
  text "PA3      PA2      GND      VCC-5.0" at 2312.2,2233.47 h30
  text "PA1     VCC-5.0     GND" at 2405.88,2025.81 h30
  text "GND     VDJ       PA15" at 450,2005.41 h30
  text "PA0     VCC-5.0     GND" at 2405,1850.41 h30
  text "GND     VDJ       PB3" at 456.56,1819.32 h30
  text "PB11  VCC-5.0   GND" at 2415,1675.41 h30
  text "GND     VDJ       PB4" at 456.56,1634.32 h30
  text "SDA      SCL      GND      VCC-5.0" at 2305,1500.41 h30
  text "GND     VDJ       PB5" at 456.56,1449.32 h30
  text "GND     VDJ       PA8" at 451.56,1269.32 h30
  text "GND     VDJ       PB15" at 451.56,1084.32 h30
Mechanical 1:
  the board outline again, w10

## Text inside footprints (layer, text, board x,y; h text height)
2: Top Overlay "3V3" at 2490,1200 h35 r90; Top Overlay "3V3" at 2490,1090 h35 r90